# Altium PCB WS7.820.291.V04.PcbDoc (part 1 of 3)
Units mil, origin at the board's own origin, x right, y up, seen from the top; angles counter-clockwise.
Board outline 9222.63 x 1665.56 mil, 4 copper layers (Top Layer, S2, S3, Bottom Layer); 240 components, 148 nets, 713 pads, 1711 vias.
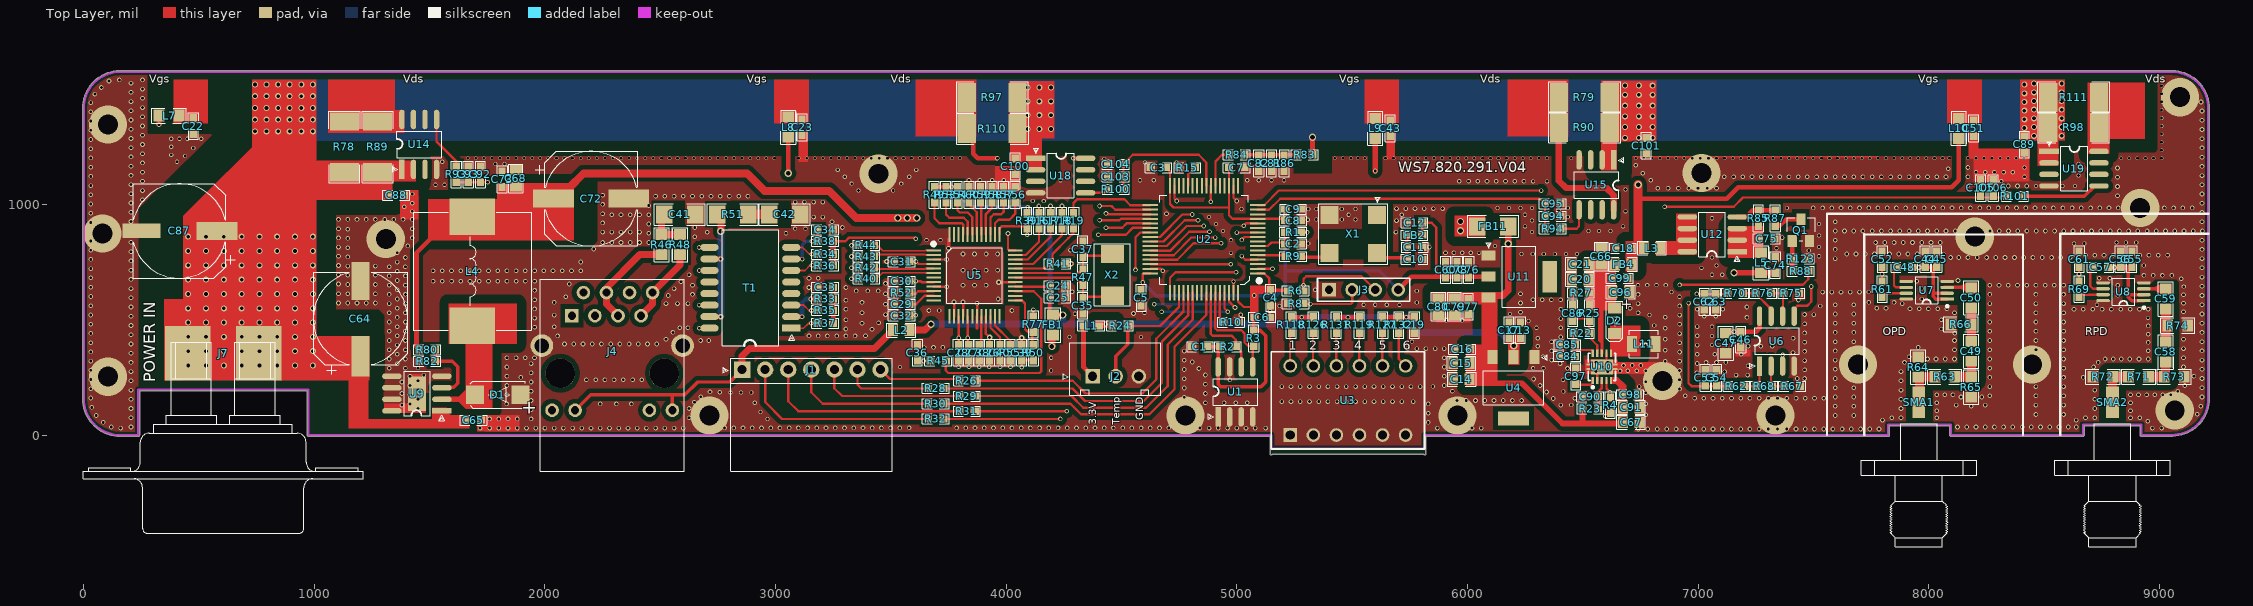
[diagram p0: Top Layer view]
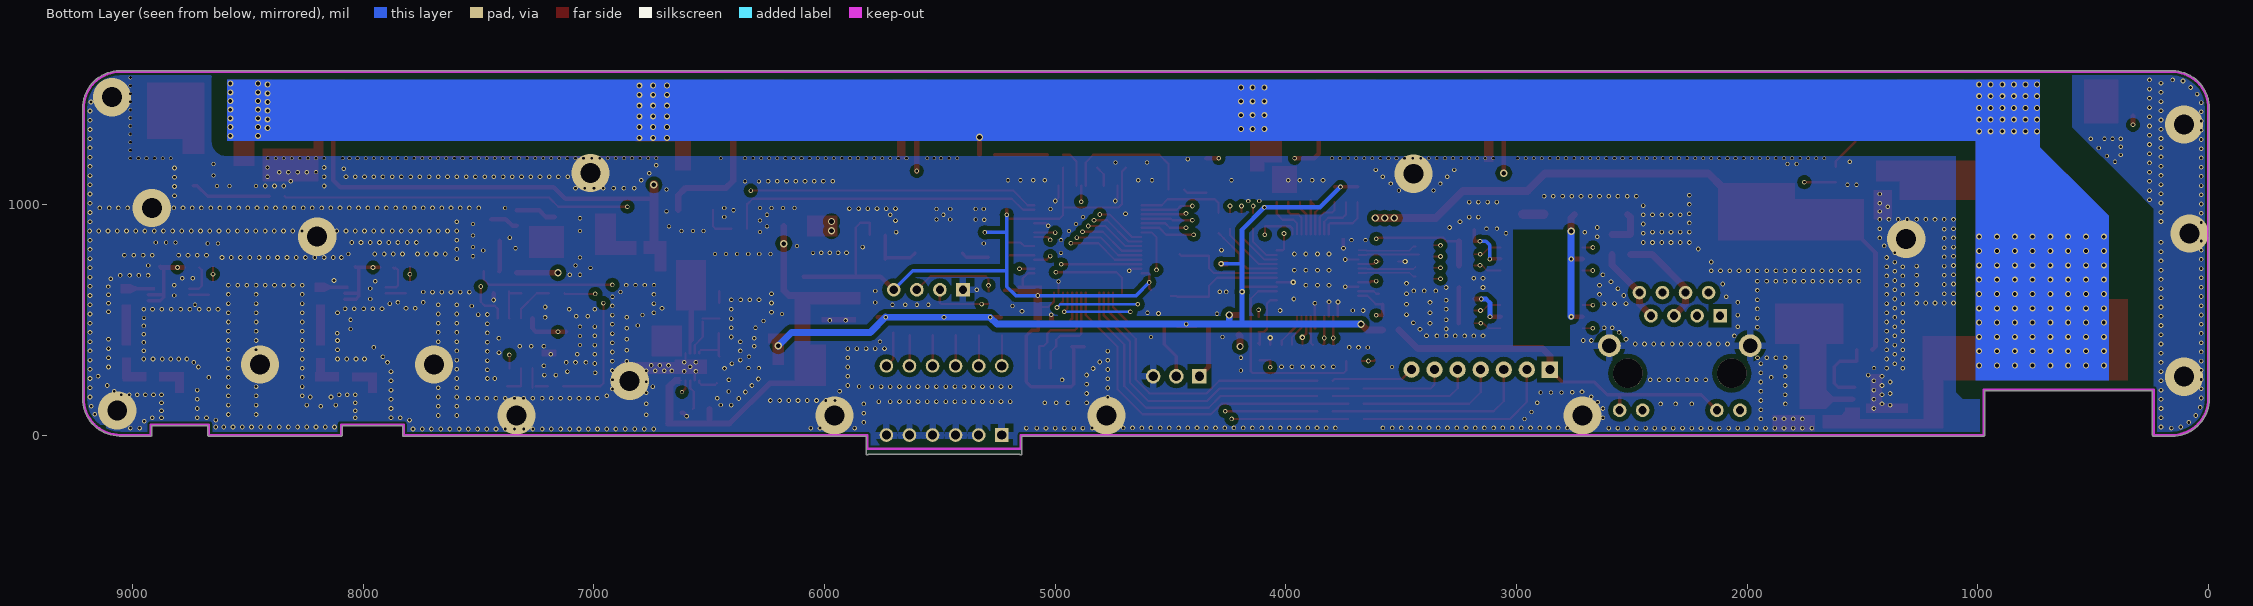
[diagram p1: Bottom Layer view, seen from below]
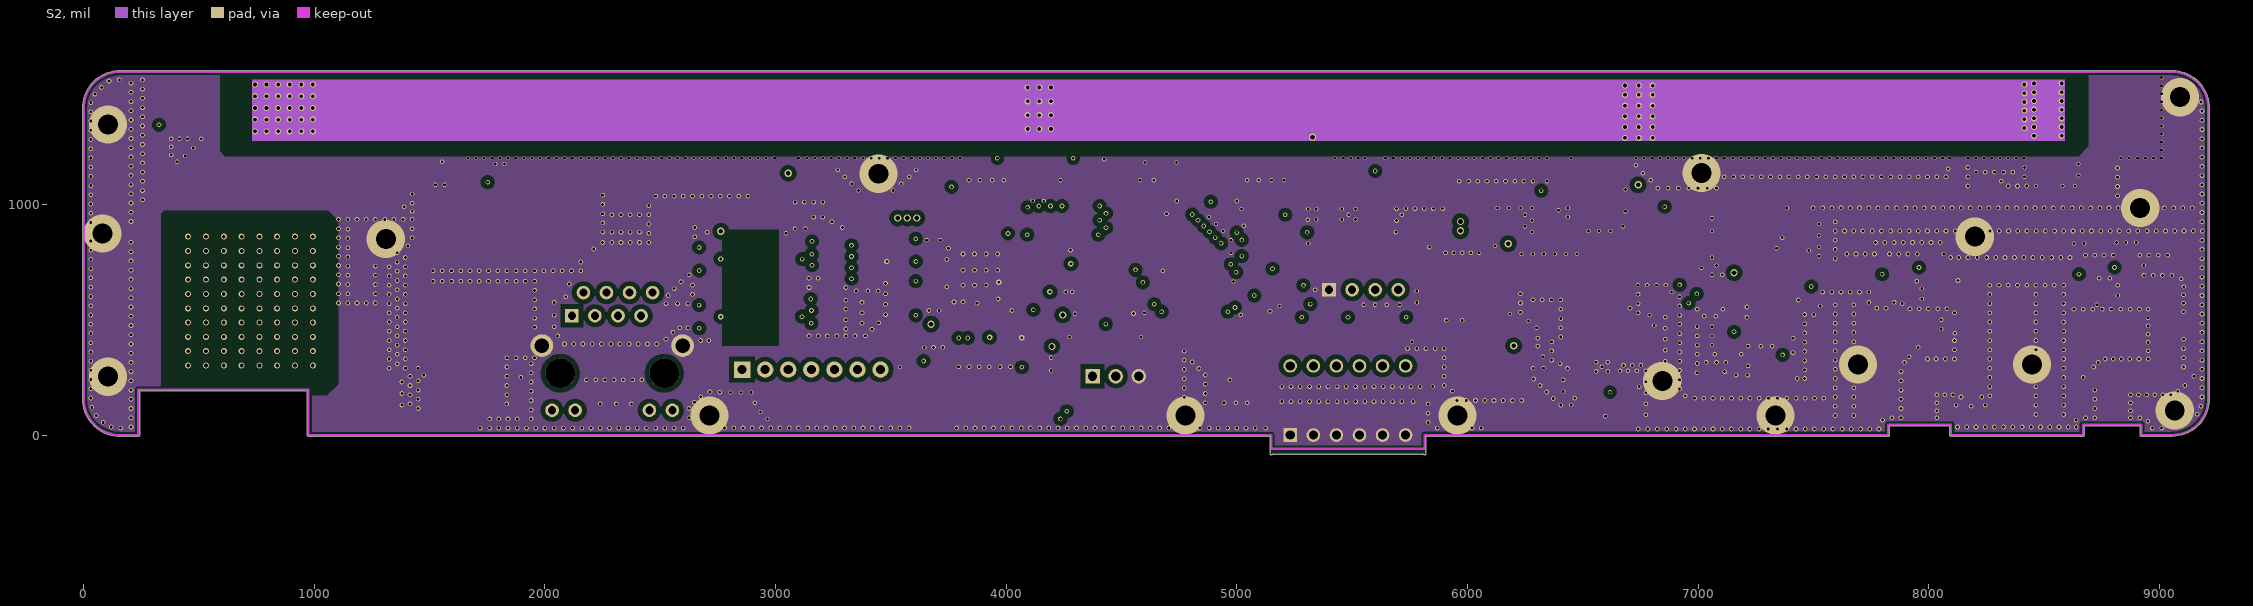
[diagram p2: S2]
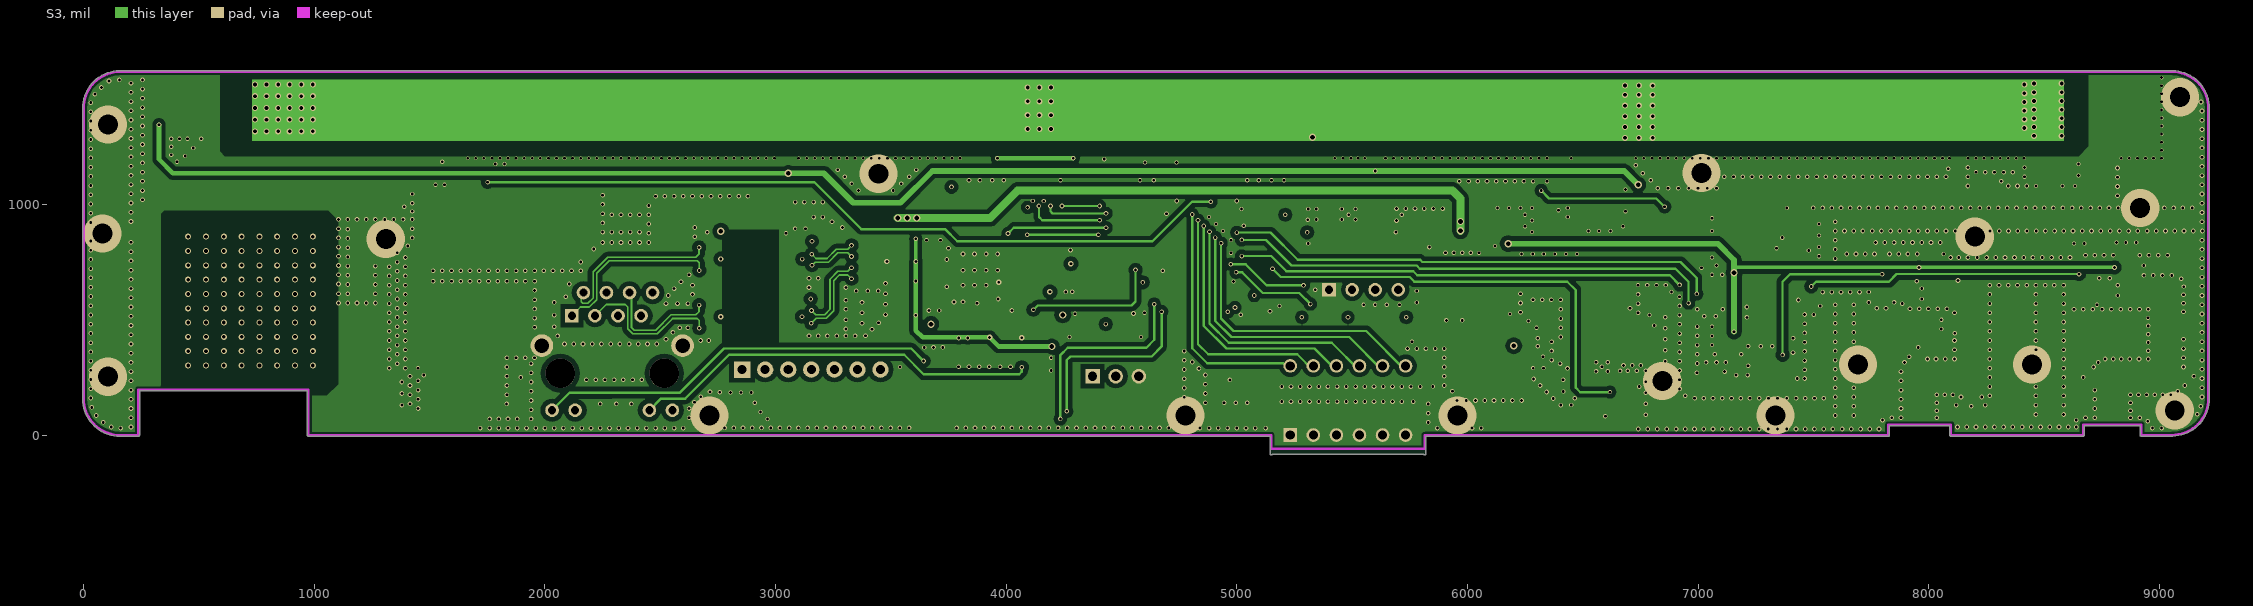
[diagram p3: S3]

## Layer stack, top to bottom
Top Solder: solder mask 0.4, Solder Resist, Dk 3.5
Top Layer: signal copper 1.4
Dielectric1: core 12.6, FR-4, Dk 4.8
S2: signal copper 1.4
Dielectric2: prepreg 12.6, FR-4, Dk 4.8
S3: signal copper 1.4
Dielectric3: core 12.6, FR-4, Dk 4.8
Bottom Layer: signal copper 1.4
Bottom Solder: solder mask 0.4, Solder Resist, Dk 3.5

## Board outline
157.8,-5.02 237.23,-5.02 ccw(c237.23,0) 242.25,0 242.25,191.84 969.99,191.84 969.99,0 ccw(c975,0) 975.03,-5.01 5144.16,-5.01 5144.16,-80.74 ccw(c5149.17,-80.74) 5153.18,-83.76 5810.52,-83.76 ccw(c5814.53,-80.74) 5819.54,-80.74 5819.54,-5.02 7825,-5.02 ccw(c7825,0) 7830.01,0 7830.01,40.1 8091.99,40.1 8091.99,0 ccw(c8097,0) 8097,-5.02 8669,-5.02 ccw(c8669,0) 8674.01,0 8674.01,40.1 8916.99,40.1 8916.99,0 ccw(c8922,0) 8922,-5.01 9055.12,-5.01 ccw(c9055.12,0) 9057.37,-4.48 ccw(c9055.12,158) 9217.61,158 9217.61,1417 ccw(c9055.12,1417) 9056.91,1579.49 ccw(c9055.12,1574.8) 9055.12,1579.82 157.48,1579.82 ccw(c157.48,1574.8) 155.68,1579.49 ccw(c157.48,1417) -5.01,1417 -5.01,159 ccw(c0,159) -4.69,157.23 ccw(c157.8,157.48)

## Design rules (kind name [scope] priority, off if disabled: settings)
Clearance Clearance_4 [InNet('28VIN') vs (InPolygon)] p1: gap=66.93
Clearance Clearance_3 [(InPolygon) vs isfill] p2: gap=40
Clearance Clearance_2 [All vs OnLayer('Keep-Out Layer')] p3: gap=10
Clearance Clearance_1 [All vs (InPolygon)] p4: gap=19.68
Clearance [All] p5: gap=8
DiffPairsRouting DiffPair_DiffPairsRouting [All] p1: maxlimit=10 minlimit=8.5 mostfreqgap=8.5 toplayer_minwidth=15 toplayer_maxwidth=15 toplayer_prefwidth=15 midlayer1_minwidth=15 midlayer1_maxwidth=15 midlayer1_prefwidth=15 midlayer2_minwidth=15 midlayer2_maxwidth=15 midlayer2_prefwidth=15 bottomlayer_minwidth=15 bottomlayer_maxwidth=15 bottomlayer_prefwidth=15 maxuncoupledlength=500
DiffPairsRouting [All] p2: maxlimit=10 minlimit=10 mostfreqgap=10 toplayer_minwidth=15 toplayer_maxwidth=15 toplayer_prefwidth=15 midlayer1_minwidth=15 midlayer1_maxwidth=15 midlayer1_prefwidth=15 midlayer2_minwidth=15 midlayer2_maxwidth=15 midlayer2_prefwidth=15 bottomlayer_minwidth=15 bottomlayer_maxwidth=15 bottomlayer_prefwidth=15 maxuncoupledlength=500
HoleSize [All] p1: absolutevalues=TRUE maxlimit=393.7 minlimit=1 maxpercent=80.000 minpercent=20.000
HoleToHoleClearance [All] p1: gap=8 allowstackedmicrovias=TRUE
MatchedLengths DiffPair_MatchedLengths [All] p1: tolerance=1000 checknetsindiffpair=FALSE checkdiffpairvsdiffpair=TRUE checkothers=FALSE
MinimumSolderMaskSliver [All] p1: minsoldermaskwidth=0
PlaneConnect [isvia] p1: planeconnectstyle=Direct reliefexpansion=20 reliefentries=4 reliefconductorwidth=10 reliefairgap=10
PlaneConnect PlaneConnect_1 [All] p2: planeconnectstyle=Relief reliefexpansion=20 reliefentries=4 reliefconductorwidth=30 reliefairgap=10
PolygonConnect PolygonConnect_1 [isvia] p1: connectstyle=Direct reliefconductorwidth=10 reliefentries=4 polygonreliefangle="90 Angle" airgapwidth=10
PolygonConnect [OnLayer('Bottom Layer')] p2: connectstyle=Relief reliefconductorwidth=30 reliefentries=4 polygonreliefangle="90 Angle" airgapwidth=10
PolygonConnect PolygonConnect_2 [All] p3: connectstyle=Direct reliefconductorwidth=10 reliefentries=4 polygonreliefangle="90 Angle" airgapwidth=10
RoutingVias [All] p1: holewidth=12 width=20 viastyle="Through Hole" minholewidth=12 minwidth=20 maxholewidth=28 maxwidth=50
SilkToSilkClearance [All] p1: silktosilkclearance=0
SilkToSolderMaskClearance SilkscreenOverComponentPads [IsPad] p1: minsilkscreentomaskgap=0 clearancetoexposedcopper=TRUE
SolderMaskExpansion [All] p1: expansion=4
Width DiffPair_Width [All] p1: maxlimit=100 minlimit=7.5 preferedwidth=7.5
Width [All] p2: maxlimit=39.37 minlimit=7.5 preferedwidth=10 midlayer1_maxwidth=10 midlayer2_maxwidth=10 minimp=50.000000 maximp=50.000000 favimp=50.000000
22 further rules are at their usual default settings.

## Classes and differential pairs
component class 3-RF: C44 C45 C46 C47 C48 C49 C50 C52 C53 C54 C55 C56 C57 C58 C59 C61 C62 C63 C69 C70 C71 C111 C118 C119 C120 C122 C123 C124 C125 C126 C127 D3 Q2 Q3 R61 R62 R63 R64 R65 R66 R67 R68 R69 R70 R71 R72 R73 R74 R75 R76 R137 R138 R139 R140 R141 R142 R143 R144 R145 R146 R147 R148 SMA1 SMA2 U6 U7 U8
component class 4-POWER: C13 C14 C15 C16 C17 C18 C19 C20 C21 C22 C23 C43 C51 C60 C64 C65 C66 C67 C68 C72 C73 C74 C75 C76 C77 C78 C79 C80 C81 C82 C83 C84 C85 C86 C87 C88 C89 C90 C91 C92 C93 C94 C95 C96 C97 C98 C99 C100 C101 C103 C104 C105 C106 C? D1 D2 FB4 FB11 J7 L3 L4 L5 L7 L8 L9 L10 L11 Q1 R4 R22 R23 R25 R27 R78 R79 R80 R82 R83 R84 R85 R86 R87 R88 R89 R90 R93 R94 R97 R98 R100 R101 R110 R111 R123 U4 U9 U10 U11 U12 U13 U14 U15 U18 U19
component class 2-RJ45: C24 C25 C26 C27 C28 C29 C30 C31 C32 C33 C34 C35 C36 C37 C38 C39 C40 C41 C42 FB1 J4 R33 R34 R35 R36 R37 R38 R39 R40 R41 R42 R43 R44 R45 R46 R47 R48 R49 R50 R51 R52 R53 R54 R55 R56 R57 R58 R59 R60 T1 U5 X2
component class 1-MCU: C1 C2 C3 C4 C5 C6 C7 C8 C9 C10 C11 C12 FB2 J1 J2 J3 L1 L2 R1 R2 R3 R6 R8 R9 R10 R15 R16 R17 R18 R19 R24 R26 R28 R29 R30 R31 R32 R77 R118 R119 R126 R127 R131 R132 TP3 U1 U2 U3 X1
differential pair W5500_TX1: +W5500_TX1_P -W5500_TX1_N
differential pair W5500_RX1: +W5500_RX1_P -W5500_RX1_N
differential pair TX: +TX_P -TX_N
differential pair TX1: +TX1_P -TX1_N
differential pair RX: +RX_P -RX_N
differential pair RX1: +RX1_P -RX1_N

## Components (designator, comment, footprint, x,y, rotation, side; value= is the part's Value field where it differs from the comment)
C1 "0.1uF" C0603#1 4840,383.65 r0 top
C2 "0.1uF" C0603#1 5243.85,828.76 r180 top
C3 "0.1uF" C0603#1 4660,1160 r0 top
C4 "0.1uF" C0603#1 5146.35,595 r90 top
C5 "0.1uF" C0603#1 4585,595 r90 top
C6 "0.1uF" C0603#1 5110,510 r180 top
C7 "0.1uF" C0603#1 5000,1160 r180 top
C8 "0.1uF" C0603#1 5243.85,930 r180 top
C9 "10uF/6.3V" C0603#1 5243.77,980 r180 top
C10 "10uF/6.3V" C0603#1 5770.32,761.23 r180 top
C11 "0.1uF" C0603#1 5770.32,814.05 r0 top
C12 "0.1uF" C0603#1 5770.85,920.23 r180 top
C13 "0.1uF" C0603#2 6230,455 r90 top
C14 "10uF/10V" C0805#1 5974,242 r0 top
C15 "10uF/10V" C0805#1 5974,312 r0 top
C16 "0.1uF" C0603#2 5978,372 r180 top
C17 "10uF/6.3V" C0603#2 6180,455 r90 top
C18 "0.1uF" C0603#2 6675,810.35 r180 top
C19 "10uF/6.3V" C0603#2 5770,477.23 r270 top
C20 "10uF/10V" C0805#1 6489,675 r0 top
C21 "10uF/10V" C0805#1 6489,740 r0 top
C22 "0.1uF" C0603#2 475,1340 r90 top
C23 "0.1uF" C0603#2 3115,1335 r90 top
C24 "0.1uF" C0603#1 4222.85,647.46 r180 top
C25 "10uF/6.3V" C0603#1 4222.85,596.23 r180 top
C26 "0.1uF" C0603#1 3927.85,357.46 r90 top
C27 "0.1uF" C0603#1 3837.85,357.46 r90 top
C28 "0.1uF" C0603#1 3792.85,357.46 r90 top
C29 "0.1uF" C0603#1 3546.85,567.46 r0 top
C30 "0.1uF" C0603#1 3546.85,667.46 r0 top
C31 "0.1uF" C0603#1 3546.85,752.46 r0 top
C32 "10uF/6.3V" C0603#1 3546.85,517.46 r0 top
C33 "10nF" C0603#1 3215,640 r0 top
C34 "22nF" C0603#1 3216,890.23 r180 top
C35 "18pF" C0603#1 4332.85,561.23 r90 top
C36 "1000pF" C0603#1 3615,357.46 r270 top
C37 "18pF" C0603#1 4332.85,806.23 r270 top
C38 "4.7uF" C0603#1 3882.85,357.46 r90 top
C39 "1000pF" C0603#1 4067.85,357.46 r270 top
C40 "10nF" C0603#1 3972.85,357.46 r90 top
C41 "1000pF/2KV" C1206 2585,957 r180 top
C42 "1000pF/2KV" C1206 3039.85,957 r180 top
C43 "0.1uF" C0603#2 5665,1330 r90 top
C44 "100pF" C0603#1 7985,763 r90 top
C45 "0.1uF" C0603#1 8035,763 r90 top
C46 "0.1uF" C0603#1 7185.09,414 r270 top
C47 "10uF/10V" C0805#2 7120.09,398 r270 top
C48 "0.1uF" C0603#1 7895,726.65 r0 top
C49 "100pF" C0805#2 8185,363.12 r90 top
C50 "100pF" C0805#2 8185,595 r90 top
C51 "0.1uF" C0603#2 8195,1330 r90 top
C52 "0.1uF" C0603#1 7798,763 r270 top
C53 "10uF/6.3V" C0603#1 7031.56,248.46 r270 top
C54 "0.1uF" C0603#1 7081.56,248.46 r270 top
C55 "100pF" C0603#1 8881.27,763 r90 top
C56 "0.1uF" C0603#1 8831.27,763 r90 top
C57 "0.1uF" C0603#1 8745,726.65 r0 top
C58 "100pF" C0805#2 9027.69,360.27 r90 top
C59 "100pF" C0805#2 9027.69,590 r90 top
C60 "10uF/6.3V" C0603#2 5905,717 r90 top
C61 "0.1uF" C0603#1 8652,763 r270 top
C62 "10uF/6.3V" C0603#1 7026.56,578.46 r90 top
C63 "0.1uF" C0603#1 7076.56,578.47 r90 top
C64 "100uF/63V" ECAP2SM_10R4x10R4#1 1200,505 r90 top
C65 "0.1uF" C0603#1 1689,65 r180 top
C66 "10uF/10V" C0805#1 6580,775 r270 top
C67 "10uF/10V" C0805#1 6710,55.83 r180 top
C68 "10uF/10V" C0805#1 1874,1113 r270 top
C72 "1000uF/16V" ECAP2SM_10R4x10R4#2 2200,1025 r0 top
C73 "0.1uF" C0603#1 1814,1109 r270 top
C74 "1uF" C0603#1 7334.4,737.23 r90 top
C75 "0.1uF" C0603#1 7298.05,850.46 r0 top
C76 "1uF" C0603#1 6005,717 r270 top
C77 "0.1uF" C0603#1 6004,557 r90 top
C78 "10uF/6.3V" C0603#2 5955,717 r90 top
C79 "10uF/10V" C0805#1 5944,557 r90 top
C80 "10uF/10V" C0805#1 5874,557 r90 top
C81 "10uF/6.3V" C0603#1 5150,1178.65 r90 top
C82 "0.1uF" C0603#1 5095,1178.65 r90 top
C84 "0.1uF" C0603#2 6433,341 r0 top
C85 "0.1uF" C0603#2 6433,391 r0 top
C86 "10pF" C0603#2 6456.65,529 r270 top
C87 "100uF/63V" ECAP2SM_10R4x10R4#3 415,885 r180 top
C88 "0.1uF" C0603#1 1355,1040 r180 top
C89 "0.1uF" C0603#1 8415,1260 r90 top
C90 "0.1uF" C0603#2 6533,166 r180 top
C91 "10uF/10V" C0805#1 6710,120 r180 top
C92 "10uF/6.3V" C0603#1 1720.65,1130 r270 top
C93 "0.1uF" C0603#1 1667.83,1130 r270 top
C94 "10uF/6.3V" C0603#1 6370,949.33 r180 top
C95 "0.1uF" C0603#1 6370,1003.65 r180 top
C96 "10uF/10V" C0805#1 6665,620 r180 top
C97 "10NF" C0603#2 6469.35,255 r90 top
C98 "1uF" C0603#2 6706,175 r0 top
C99 "0.1uF" C0603#2 6661,680 r0 top
C100 "0.1uF" C0603#1 4038.85,1165 r90 top
C101 "0.1uF" C0603#1 6775,1255 r90 top
C103 "10uF/6.3V" C0603#1 4475,1120 r0 top
C104 "0.1uF" C0603#1 4475,1175 r0 top
C105 "10uF/6.3V" C0603#1 8225,1071.35 r270 top
C106 "0.1uF" C0603#1 8280,1071.35 r270 top
D1 "SS36" DO-214AC 1795,175 r180 top
D2 "SL02" SL02 6638,496 r270 top
FB1 "FB" L0805#1 4202.85,477.46 r270 top
FB2 "FB_0603" L0603 5770.85,867.41 r0 top
FB4 "open" L0805#2 6675,740 r0 top
FB11 "FB_1206" L1206 6110,905 r0 top
J1 "open" "KF2510-7P -2R54-17R8x6R0-wanzhen" 2855,283.77 r0 top
J2 "XH2.54-3P" XH2.54mm-10R0x7R0--zhizhen 4375,255 r0 top
J3 "Header 4" HDR1X4 5400,630 r0 top
J4 "RJ45插座" RJ45TH-1x1-2R54-LED 2291.85,567.49 r0 top
J7 "DB2" DB2TM-VM 605,355 r180 top locked
L1 "FB_0603" L0603 4369,473 r0 top
L2 "FB_0805" L0805#2 3545,455 r0 top
L3 "FB_0805" L0805#2 6800,811 r180 top
L4 "100uH" PL2SM-12R5x12R5 1685,710 r180 top
L5 "FB_0805" L0805#1 7273.05,747.23 r90 top
L7 "FB" L0805#1 370,1385 r0 top
L8 "FB" L0805#1 3055,1335 r90 top
L9 "FB" L0805#1 5600,1330 r90 top
L10 "FB" L0805#1 8130,1330 r90 top
L11 "4.7uF" PL2SM-3R0x3R0 6765,395 r180 top
Q1 "MMBT2222" SOT23-3 7445.97,888.67 r270 top
R1 "4.7K" R0603 5243.85,878.83 r0 top
R2 "4.7K" R0603 4961.85,383.65 r180 top
R3 "4.7K" R0603 5073.65,420 r90 top
R4 "10K" R0603 6620,130 r270 top
R6 "4.7K" R0603 5255,625 r180 top
R8 "4.7K" R0603 5255,570 r0 top
R9 "30Ω" R0603 5244.38,774.23 r180 top
R10 "1K" R0603 4975,490 r180 top
R15 "1K" R0603 4785,1160 r0 top
R16 "30Ω" R0603 4142,929 r270 top
R17 "30Ω" R0603 4192,929 r270 top
R18 "30Ω" R0603 4242,929 r270 top
R19 "30Ω" R0603 4292,929 r270 top
R22 "150KΩ" R0603 6493,441 r180 top
R23 "10Ω" R0603 6533,113 r0 top
R24 "4.7K" R0603 4494,473 r0 top
R25 "619KΩ" R0603 6529.35,529 r270 top
R26 "300Ω" R0603 3830,235 r0 top
R27 "100KΩ" R0603 6493,616 r180 top
R28 "300Ω" R0603 3695,202 r0 top
R29 "300Ω" R0603 3830,169 r0 top
R30 "300Ω" R0603 3695,136 r0 top
R31 "300Ω" R0603 3830,103 r0 top
R32 "300Ω" R0603 3695,70 r0 top
R33 "0Ω" R0603 3215,590 r180 top
R34 "49.9Ω" R0603 3216,784 r0 top
R35 "82Ω" R0603 3216,540.23 r180 top
R36 "49.9Ω" R0603 3216,735 r0 top
R37 "82Ω" R0603 3216,485.23 r180 top
R38 "10Ω" R0603 3216,840.23 r0 top
R39 "4.7K" R0603 4090,929 r90 top
R40 "30Ω" R0603 3393.85,677.46 r180 top
R41 "4.7K" R0603 4222.85,742.46 r0 top
R42 "30Ω" R0603 3393.85,725.8 r180 top
R43 "30Ω" R0603 3393.85,774.13 r180 top
R44 "30Ω" R0603 3393.85,822.46 r180 top
R45 "300Ω" R0603 3705,321.12 r0 top
R46 "75Ω" R0805 2506,825.47 r270 top
R47 "1M" R0603 4332.85,684.46 r270 top
R48 "75Ω" R0805 2586,825.47 r270 top
R49 "4.7K" R0603 3688.85,1042.46 r90 top
R50 "300Ω" R0603 4117.85,357.46 r90 top
R51 "75Ω" R1206 2814.85,957 r180 top
R52 "12.4K" R0603 3546.85,617.46 r0 top
R53 "4.7K" R0603 3738.85,1042.46 r90 top
R54 "4.7K" R0603 3788.85,1042.46 r90 top
R55 "1K" R0603 4017.85,357.46 r90 top
R56 "1K" R0603 4038.85,1042.46 r270 top
R57 "1K" R0603 3988.85,1042.46 r270 top
R58 "1K" R0603 3938.85,1042.46 r270 top
R59 "1K" R0603 3888.85,1042.46 r270 top
R60 "1K" R0603 3838.85,1042.46 r270 top
R61 "1K" R0603 7798,633 r90 top
R62 "0Ω" R0603 7166.56,212.12 r180 top
R63 "240Ω" R0805 8070,253.12 r0 top
R64 "62Ω" R0805 7955,295 r270 top
R65 "62Ω" R0805 8185,208.12 r90 top
R66 "51Ω" R0805 8140,480 r0 top
R67 "open" R0603 7408.85,212.12 r180 top
R68 "0Ω" R0603 7286.56,212.12 r180 top
R69 "1K" R0603 8652,633 r90 top
R70 "0Ω" R0603 7161.56,614.81 r180 top
R71 "240Ω" R0805 8910.35,253.12 r0 top
R72 "62Ω" R0805 8755.69,253.12 r0 top
R73 "62Ω" R0805 9065,253.12 r180 top
R74 "51Ω" R0805 9080,475 r180 top
R75 "open" R0603 7403.85,614.81 r180 top
R76 "0Ω" R0603 7282.7,614.81 r180 top
R77 "0Ω" R0603 4117.85,480 r270 top
R78 "0.004" R2512 1130,1250 r90 top (schematic designator R45)
R79 "0.004" R2512 6507,1464 r180 top (schematic designator R47)
R80 "6.2K" R0603 1490,370 r180 top
R82 "2K" R0603 1490,320 r180 top
R83 "12.4K" R0603 5295,1215 r180 top
R84 "1K" C0603#1 5000,1215 r0 top
R85 "10K" R0603 7261.7,940.46 r270 top
R86 "1.5K" R0603 5205,1178.65 r90 top
R87 "0Ω" R0603 7334.4,940.46 r90 top
R88 "1K" R0603 7444.85,710.88 r180 top
R89 "0.004" R2512 1275,1250 r90 top (schematic designator R198)
R90 "0.004" R2512 6507,1334 r180 top (schematic designator R199)
R93 "1K" R0603 1615,1130 r270 top
R94 "1K" R0603 6370,895 r180 top
R97 "0.004" R2512 3939,1464 r180 top (schematic designator R202)
R98 "0.004" R2512 8629,1334 r0 top (schematic designator R102)
R100 "1K" R0603 4475,1065 r0 top
R101 "1K" R0603 8374,1035 r180 top
R110 "0.004" R2512 3939,1329 r180 top (schematic designator R92)
R111 "0.004" R2512 8629,1464 r0 top (schematic designator R93)
R118 "4.7K" R0603 5236.85,477.23 r90 top
R119 "4.7K" R0603 5531.85,477.23 r90 top
R123 "1K" R0603 7444.85,763.57 r180 top
R126 "4.7K" R0603 5331.85,477.23 r90 top
R127 "4.7K" R0603 5631.85,477.23 r90 top
R131 "4.7K" R0603 5431.85,477.23 r90 top
R132 "4.7K" R0603 5701.85,477.23 r90 top
SMA1 "SMA-50KFD-4" SMA-50KFD-4 7955,142.18 r270 top (schematic designator SMA2)
SMA2 "SMA-50KFD-4" SMA-50KFD-4 8794.33,142.18 r270 top locked (schematic designator SMA3)
T1 "HX1188NL" SOP16-1R27-7R11x12R7 2890.85,638.46 r180 top locked
U1 "AT24C02N" SOIC8_1R27_3R9x4R9 4994,187 r90 top
U2 "STM32F103RCT6" LQFP64-0R50-10x10 4856.32,848.23 r90 top locked
U3 "2.54mm-6P" CON12TM-2R54-2X6-BOMA 5481.85,149.97 r0 top
U4 "LM1117S-3.3" SOT-223 6200,205 r180 top
U5 "W5500" TQFN48-0R5-7X7 3862.85,692.46 r0 top locked
U6 "LM358" SOIC8_1R27_3R9x4R9 7341.56,407.46 r90 top
U7 "AD8361ARMZ" micro_SOIC8-0R65-3x3 7991.55,627.65 r180 top locked
U8 "AD8361ARMZ" micro_SOIC8-0R65-3x3 8844.73,621.39 r180 top locked
U9 "LM2576HVDP-ADJ" SOIC8_1R27_3R9x4R9-1 1445,180 r180 top
U10 "TPS63700DRCR" VSON10-0R5-3x3 6583,296 r90 top
U11 "LM1117S-3.3" SOT-223 6224,687 r270 top
U12 "IRF7240TR" SOIC8_1R27_3R9x4R9 7061.58,870.46 r180 top
U14 "MAX4080TASA" SOIC8_1R27_3R9x4R9 1455,1260 r90 top
U15 "MAX4080TASA" SOIC8_1R27_3R9x4R9 6559,1085 r270 top
U18 "MAX4080TASA" SOIC8_1R27_3R9x4R9 4236,1125 r0 top
U19 "MAX4080TASA" SOIC8_1R27_3R9x4R9 8630,1155 r0 top
X1 "8M" CRY4SM-5R0x7R0 5505,872 r180 top
X2 "25M" CRY2SM-6R0x3R5 4460.85,694.46 r270 top

## Footprints (in the part's own frame and the unit in brackets; to place one, negate y for a bottom-side part, rotate by r counter-clockwise, add the part's x,y. Pads: shape width x height; smd on the part's side, far side on the other; paste and mask are expansions set on the pad)
C0603#1 [mm]
  rect 0.9x0.8 smd: 1(-0.85,0) 2(0.85,0)
  silkscreen extent -1.47,-0.55 1.47,0.55
C0603#2 [mm]
  rect 0.9x0.8 smd: 1(0.85,0) 2(-0.85,0)
  silkscreen extent -1.47,-0.55 1.47,0.55
C0805#1 [mm]
  rect 1.1x1.3 smd: 1(-0.9,0) 2(0.9,0)
  silkscreen extent -1.57,-0.76 1.57,0.76
C0805#2 [mm]
  rect 1.2x1.3 smd: 1(-1.1,0) 2(1.1,0)
  silkscreen extent -1.88,-0.84 1.88,0.84
C1206 [mm]
  rect 1.8x2 smd: 1(-1.7,0) 2(1.7,0)
  silkscreen extent -2.79,-1.19 2.79,1.19
CON12TM-2R54-2X6-BOMA [mm]
  rect 1.5x1.5 hole 1: 1(-6.35,-3.81)
  round 1.5 hole 1: 2(-6.35,3.81) 3(-3.81,-3.81) 4(-3.81,3.81) 5(-1.27,-3.81) 6(-1.27,3.81) 7(1.27,-3.81) 8(1.27,3.81) 9(3.81,-3.81) 10(3.81,3.81) 11(6.35,-3.81) 12(6.35,3.81)
  silkscreen extent -8.45,-5.36 8.45,5.36
CRY2SM-6R0x3R5 [mm]
  rect 2x2.5 smd: 1(-2.3,0) 2(2.3,0)
  silkscreen extent -3.4,-2.03 3.4,1.97
CRY4SM-5R0x7R0 [mm]
  rect 2x2 smd: 1(-2.6,-2.1) 2(2.6,-2.1) 3(2.6,2.1) 4(-2.6,2.1)
  silkscreen extent -3.81,-4.02 3.81,3.33
DB2TM-VM [mm] "DB2"
  rect 5x6 smd: 1(-3.9,0) 2(3.9,0)
  Top Overlay keep-out lines w0.1: -1.298,2.812 -5.698,2.812
  silkscreen extent -15.4,-1.19 15.4,19.81
DO-214AC [mm]
  rect 2x2 smd: 1(-2.5,0) 2(2.5,0)
  silkscreen extent -3.04,-1.49 3.04,1.49
ECAP2SM_10R4x10R4#1 [mm]
  rect 4.5x2 smd: 1(-4.15,0)
  rect 4.191x2 smd: 2(4.15,0)
  silkscreen extent -6.16,-5.21 5.08,5.21
ECAP2SM_10R4x10R4#2 [mm]
  rect 4.5x2 smd: 1(-4.15,0) 2(4.15,0)
  silkscreen extent -6.16,-5.21 5.08,5.21
ECAP2SM_10R4x10R4#3 [mm]
  rect 4.5x2 smd: 1(-4.15,0)
  rect 4.191x1.6 smd: 2(4.15,0)
  silkscreen extent -6.16,-5.21 5.08,5.21
HDR1X4 [mm] "Connector; Header; 4 Position"
  rect 1.5x1.5 hole 0.9: 1(0,0)
  round 1.5 hole 0.9: 2(2.54,0) 3(5.08,0) 4(7.62,0)
  silkscreen extent -1.27,-1.27 8.89,1.27
"KF2510-7P -2R54-17R8x6R0-wanzhen" [mm]
  rect 1.8x1.8 hole 1: 1(0,0)
  round 1.8 hole 1: 2(2.54,0) 3(5.08,0) 4(7.62,0) 5(10.16,0) 6(12.7,0) 7(15.24,0)
  silkscreen extent -2.12,-11.2 16.56,1.24
L0603 [mm]
  rect 0.9x0.8 smd: 1(-0.85,0) 2(0.85,0)
  silkscreen extent -1.47,-0.55 1.47,0.55
L0805#1 [mm]
  rect 1.2x1.3 smd: 1(-1.1,0) 2(1.1,0)
  silkscreen extent -1.88,-0.84 1.88,0.84
L0805#2 [mm]
  rect 1.1x1.3 smd: 1(-0.9,0) 2(0.9,0)
  silkscreen extent -1.57,-0.76 1.57,0.76
L1206 [mm]
  rect 1.8x2 smd: 1(-1.7,0) 2(1.7,0)
  silkscreen extent -2.79,-1.19 2.79,1.19
LQFP64-0R50-10x10 [mm] "STM32F103RC"
  rect 0.22x1.7 smd: 1(-3.731,-5.941) 2(-3.231,-5.941) 3(-2.731,-5.941) 4(-2.231,-5.941) 5(-1.731,-5.941) 6(-1.231,-5.941) 7(-0.731,-5.941) 8(-0.231,-5.941) 9(0.269,-5.941) 10(0.769,-5.941) 11(1.269,-5.941) 12(1.769,-5.941) 13(2.269,-5.941) 14(2.769,-5.941) 15(3.269,-5.941) 16(3.769,-5.941) 33(3.769,5.861) 34(3.269,5.861) 35(2.769,5.862) 36(2.269,5.862) 37(1.769,5.862) 38(1.269,5.862) 39(0.769,5.862) 40(0.269,5.862) 41(-0.231,5.862) 42(-0.731,5.862) 43(-1.231,5.862) 44(-1.731,5.862) 45(-2.231,5.862) 46(-2.731,5.862) 47(-3.231,5.862) 48(-3.731,5.861)
  rect 1.7x0.22 smd: 17(5.917,-3.793) 18(5.917,-3.293) 19(5.917,-2.793) 20(5.917,-2.293) 21(5.917,-1.793) 22(5.917,-1.293) 23(5.917,-0.793) 24(5.917,-0.293) 25(5.917,0.207) 26(5.917,0.707) 27(5.917,1.207) 28(5.917,1.707) 29(5.917,2.207) 30(5.917,2.707) 31(5.917,3.207) 32(5.917,3.707) 49(-5.886,3.713) 50(-5.886,3.213) 51(-5.886,2.713) 52(-5.886,2.213) 53(-5.886,1.713) 54(-5.886,1.213) 55(-5.886,0.713) 56(-5.886,0.213) 57(-5.886,-0.287) 58(-5.886,-0.787) 59(-5.886,-1.287) 60(-5.886,-1.787) 61(-5.886,-2.286) 62(-5.886,-2.786) 63(-5.886,-3.287) 64(-5.886,-3.786)
  silkscreen extent -4.92,-6.32 4.86,4.85
micro_SOIC8-0R65-3x3 [mm] "检波器"
  rect 1.5x0.35 smd: 1(-2.25,0.975)
  oval 1.5x0.35 smd: 2(-2.25,0.325) 3(-2.25,-0.325) 4(-2.25,-0.975) 5(2.25,-0.975) 6(2.25,-0.325) 7(2.25,0.325) 8(2.25,0.975)
  silkscreen extent -2.38,-1.5 1.23,1.87
PL2SM-3R0x3R0 [mm]
  rect 1.1x1.8 smd: 1(-1.3,0) 2(1.3,0)
  silkscreen extent -1.6,-1.5 1.6,1.5
PL2SM-12R5x12R5 [mm]
  rect 5x4 smd: 1(0,6) 2(0,-6)
  silkscreen extent -6.5,-6.5 6.5,6.5
R0603 [mm]
  rect 0.9x0.8 smd: 1(-0.85,0) 2(0.85,0)
  silkscreen extent -1.47,-0.55 1.47,0.55
R0805 [mm]
  rect 1.2x1.3 smd: 1(-1.1,0) 2(1.1,0)
  silkscreen extent -1.88,-0.84 1.88,0.84
R1206 [mm]
  rect 1.8x2 smd: 1(-1.7,0) 2(1.7,0)
  silkscreen extent -2.79,-1.19 2.79,1.19
R2512 [mm]
  rect 2x3.2 smd: 1(-2.8,0) 2(2.8,0)
  silkscreen extent -3.99,-1.7 3.91,1.7
RJ45TH-1x1-2R54-LED [mm]
  rect 1.5x1.5 hole 0.9: 1(-4.445,-1.27)
  round 1.5 hole 0.9: 2(-3.175,1.27) 3(-1.905,-1.27) 4(-0.635,1.27) 5(0.635,-1.27) 6(1.905,1.27) 7(3.175,-1.27) 8(4.445,1.27) 9(-6.63,-11.68) 10(-4.09,-11.68) 11(4.09,-11.68) 12(6.63,-11.68)
  round 2.5 hole 1.6: 13(-7.75,-4.57) 14(7.75,-4.57)
  round 3.25 hole 3.25 unplated: 15(-5.715,-7.62) 16(5.715,-7.62)
  silkscreen extent -7.94,-18.42 7.94,2.73
SL02 [mm]
  rect 1.2x1.5 smd: 1(-1.4,0) 2(1.4,0)
  silkscreen extent -2.16,-0.9 2.28,0.9
SMA-50KFD-4 [mm] "SMA-JB3C"
  rect 3.5x1.4 smd: 1(0,0.06)
  silkscreen extent 2.37,-6.29 15.9,6.41
SOIC8_1R27_3R9x4R9 [mm]
  rect 2.15x0.6 smd: 1(-2.75,1.905)
  oval 2.15x0.6 smd: 2(-2.75,0.635) 3(-2.75,-0.635) 4(-2.75,-1.905) 5(2.75,-1.905) 6(2.75,-0.635) 7(2.75,0.635) 8(2.75,1.905)
  silkscreen extent -3.02,-2.45 1.47,2.99
SOIC8_1R27_3R9x4R9-1 [mm]
  rect 2.15x0.6 smd: 1(-2.75,1.905)
  oval 2.15x0.6 smd: 2(-2.75,0.635) 3(-2.75,-0.635) 4(-2.75,-1.905) 5(2.75,-1.905) 6(2.75,-0.635) 7(2.75,0.635) 8(2.75,1.905)
  rect 2x3.8 smd: 9(0,0)
  silkscreen extent -3.02,-2.45 1.47,2.99
SOP16-1R27-7R11x12R7 [mm]
  rect 2x0.76 smd: 1(-4.5,4.445)
  oval 2x0.76 smd: 2(-4.5,3.175) 3(-4.5,1.905) 4(-4.5,0.635) 5(-4.5,-0.635) 6(-4.5,-1.905) 7(-4.5,-3.175) 8(-4.5,-4.445) 9(4.5,-4.445) 10(4.5,-3.175) 11(4.5,-1.905) 12(4.5,-0.635) 13(4.5,0.635) 14(4.5,1.905) 15(4.5,3.175) 16(4.5,4.445)
  silkscreen extent -4.84,-6.4 3.1,6.4
SOT23-3 [mm]
  rect 1.3x1 smd: 1(1.2,-0.95) 2(1.2,0.95) 3(-1.2,0)
  silkscreen extent -1.34,-1.5 1.2,1.5
SOT-223 [mm]
  rect 1.1x1.55 smd: 1(-2.3,-3.375) 2(0,-3.375) 3(2.3,-3.375)
  rect 3.45x1.55 smd: 4(0,3.375)
  silkscreen extent -3.7,-3.65 3.35,1.85
TQFN48-0R5-7X7 [mm]
  rect 1.6x0.22 smd: 1(-4.5,2.75) 2(-4.5,2.25) 3(-4.5,1.75) 4(-4.5,1.25) 5(-4.5,0.75) 6(-4.5,0.25) 7(-4.5,-0.25) 8(-4.5,-0.75) 9(-4.5,-1.25) 10(-4.5,-1.75) 11(-4.5,-2.25) 12(-4.5,-2.75) 25(4.5,-2.75) 26(4.5,-2.25) 27(4.5,-1.75) 28(4.5,-1.25) 29(4.5,-0.75) 30(4.5,-0.25) 31(4.5,0.25) 32(4.5,0.75) 33(4.5,1.25) 34(4.5,1.75) 35(4.5,2.25) 36(4.5,2.75)
  rect 0.22x1.6 smd: 13(-2.75,-4.5) 14(-2.25,-4.5) 15(-1.75,-4.5) 16(-1.25,-4.5) 17(-0.75,-4.5) 18(-0.25,-4.5) 19(0.25,-4.5) 20(0.75,-4.5) 21(1.25,-4.5) 22(1.75,-4.5) 23(2.25,-4.5) 24(2.75,-4.5) 37(2.75,4.5) 38(2.25,4.5) 39(1.75,4.5) 40(1.25,4.5) 41(0.75,4.5) 42(0.25,4.5) 43(-0.25,4.5) 44(-0.75,4.5) 45(-1.25,4.5) 46(-1.75,4.5) 47(-2.25,4.5) 48(-2.75,4.5)
  silkscreen extent -4.72,-3.06 3.06,3.65
VSON10-0R5-3x3 [mm] "QFN, 12-Leads, Body 4.0x4.0mm (max), Pitch 0.50mm, IPC Low Density"
  rect 0.8x0.25 smd: 1(-1.5,1) 2(-1.5,0.5) 3(-1.5,0) 4(-1.5,-0.5) 5(-1.5,-1) 6(1.5,-1) 7(1.5,-0.5) 8(1.5,0) 9(1.5,0.5) 10(1.5,1)
  rect 0.25x0.8 smd: 11(-0.25,1.3) 11(-0.25,-1.3) 11(0.25,1.3) 11(0.25,-1.3)
  rect 1.65x2.4 smd: 11(0,0)
  silkscreen extent -2.37,-1.5 1.5,1.5
XH2.54mm-10R0x7R0--zhizhen [mm]
  rect 1.6x1.6 hole 1: 1(0,0)
  round 1.6 hole 1: 2(2.54,0) 3(5.08,0)
  silkscreen extent -3.31,-2.1 7.5,3.7

## Part data
C1 C2 C3 C4 C5 C6 C7 C8 C11 C12 C16 C24 C26 C27 C28 C29 C30 C31 C45 C46 C48 C52 C54 C56 C57 C61 C63 C65 C73 C75 C77 C82 C88 C89 C93 C95 C100 C101 C104 C106: library part 0.1uF贴片电容, "贴片电容_GRM188R71H104KA01D_0.1uF±10%,50V,0603"
C9 C10 C17 C19 C25 C32 C53 C60 C62 C78 C81 C92 C94 C103 C105: library part 10uF贴片电容, "贴片电容_GRM188R60J106ME47D_10uF±20%,6.3V,0603"
C13 C74 C76: library part 1uF贴片电容, "贴片电容_GRM188R61A105KA61D_1uF±10%,10V,0603"
C14 C15 C20 C21 C47 C66 C67 C68 C79 C80 C91 C96: library part 10uF贴片电容, "贴片电容_GRM21BR61A106KE19L_10uF±10%,10V,0805"
C18 C22 C23 C43 C51 C84 C85 C90 C99: "GRM188R71H104KA01D"
C33 C40: library part 0.1uF贴片电容, "贴片电容_10nF±10%,50V,0603"
C34: library part 27nF贴片电容, "贴片电容_22nF±5%,50V,0603"
C35 C37: library part 20pF贴片电容, "贴片电容_18pF±5%,50V,0603"
C36 C39: library part 1000pF贴片电容, "贴片电容_GRM188R71H102KA01_1000pF±10%,50V,0603"
C38: library part 1uF贴片电容, "贴片电容_4.7uF±10%,50V,0603"
C41 C42: library part 10uF贴片电容, "贴片电容_1000pF/2KV"
C44 C55: library part 220pF贴片电容, "贴片电容_100pF±10%,50V,0603"
C49 C50 C58 C59: library part 100pF贴片电容, "贴片电容_GRM2165C1H101JA01D_100pF±5%,50V,0805"
C64 C87: "贴片电解电容_VEJ101M1JTR-1010_100uF/63V,±20%,表贴D10*H10"
C72: "贴片电解电容_VE102M1CTR-1010_1000uF/16V,±20%,表贴10*10"
C86: library part 10pF贴片电容, "贴片电容_0603CG100J500NT_10pF±5%,50V,0603"
C97: library part 0.1uF, "0603,10NF,50V,±10％,X7R"
C98: library part 0.1uF
D1: library part 肖特基整流二极管_SS36, "肖特基整流二极管_SS36_封装SMA,3A/60V"
D2: library part 肖特基整流二极管_SS36, "肖特基整流二极管_SL02_1.1A/20V"
FB1 FB4 L1 L2 L3 L5 L7 L8 L9 L10: library part 0805贴片磁珠, "贴片磁珠_600R,0805"
FB2: library part 0603贴片磁珠, "贴片磁珠_100R,0603"
FB11: library part 1206贴片磁珠, "贴片磁珠_30R,6A,1206"
J1: library part KF2510-7P连接器, "连接器_KF2510-7P_直插,间距2.54mm"
J2: "连接器_XH2.54-3P_弯针,间距2.54mm"
J3: "Header, 4-Pin"
J4: library part RJ45弯脚带灯, "RJ45插座_1*1,带左黄右绿灯,弯脚"
J7: library part DB2公头座子, "连接器_DB2公头,电源接头"
L4: library part 100uH贴片功率电感, "贴片功率电感_SLF12575T-101M1R9-PF_100uH±20%,额定电流1.9A,12.5x12.5"
L11: library part SLF6025T-100M1R0-PF, "SLF6025-4.7uF"
Q1: "NPN三极管_MMBT2222_表贴SOT23"
R1 R2 R3 R6 R24 R39 R41 R49 R53 R54: library part 4.7K贴片电阻, "贴片电阻_4.7K±5%,0603"
R4 R85: library part 10K贴片电阻, "贴片电阻_10K±5%,0603"
R8 R10 R15 R55 R56 R57 R58 R59 R60 R61 R69 R84 R88 R93 R94 R100 R101 R123: library part 1K贴片电阻, "贴片电阻_1K±5%,0603"
R9 R16 R17 R18 R19 R40 R42 R43 R44: library part 30Ω贴片电阻, "贴片电阻_30Ω±5%,0603"
R22 R25 R27: library part 10Ω贴片电阻
R23 R38: library part 10Ω贴片电阻, "贴片电阻_10Ω±5%,0603"
R26 R28 R29 R30 R31 R32 R45 R50: library part 300Ω贴片电阻, "贴片电阻_300Ω±5%,0603"
R33 R62 R68 R70 R76 R77 R87: library part 0Ω贴片电阻, "贴片电阻_0Ω±5%,0603"
R34 R36: library part 51Ω贴片电阻, "贴片电阻_49.9Ω±1%,0603"
R35 R37: library part 51Ω贴片电阻, "贴片电阻_82Ω±1%,0603"
R46 R48: library part 75Ω贴片电阻, "贴片电阻_75Ω±5%,0805"
R47: library part 1M贴片电阻, "贴片电阻_1M±5%,0603"
R51: library part 75Ω贴片电阻, "贴片电阻_75Ω±5%,1206"
R52: library part 12K贴片电阻, "贴片电阻_12.4K±1%,0603"
R63 R71: library part 300Ω贴片电阻, "贴片电阻_300Ω±5%,0805"
R64 R65 R72 R73: library part 62Ω贴片电阻, "贴片电阻_62Ω±5%,0805"
R66 R74: library part 51Ω贴片电阻, "贴片电阻_51Ω±5%,0805"
R67 R75: library part 0Ω贴片电阻
R78 R79 R89 R90 R97 R98 R110 R111: library part 0.004Ω检流电阻-大封装, "贴片电阻_LR12DTDSR004_0.004±5%,2W,2512"
R80: library part 6.2K贴片电阻, "贴片电阻_6.2K±5%,0603"
R82: library part 2K贴片电阻, "贴片电阻_2K±5%,0603"
R83: library part 12.4K贴片电阻, "贴片电阻_12.4K±1%,0603"
R86: library part 1.5K贴片电阻, "贴片电阻_1.5K±5%,0603"
R118 R119 R126 R127 R131 R132: library part 1.5K贴片电阻, "贴片电阻_4.7K±5%,0603"
SMA1 SMA2: "射频同轴连接器_SMA-50KFD-4"
T1: "网络变压器_HX1188NL_百兆,SOIC16"
U1: "EEPROM_AT24C02N_SOIC8"
U2: "MCU_STM32F103RCT6_32bit,LQFP64"
U3: library part 拨码开关, "拨码开关_2.54mm-6P_侧拨"
U4 U11: "LDO_LM1117S-3.3_1A输出,SOT223"
U5: "以太网控制器_W5500_LQFP48"
U6: "运算放大器_LM358_SOIC8"
U7 U8: "检波器_AD8361ARMZ_LF to 2.5 GHz,SOIC8"
U9: "稳压集成电路_LM2576HVDP-ADJ_3A输出,SOIC8"
U10: "负压转换器_TPS63700DRCR_360mA输出,VSON-10"
U12: "P-MOSFET_IRF7240TR_SOIC8"
U14 U15 U18 U19: "电流检测放大器_MAX4080TASA_SOIC8"
X1: library part 16M贴片有源晶振, "贴片有源晶振_8M,20ppm,封装5x7"
X2: library part 25M贴片无源晶体, "贴片无源晶体_25MHz,30ppm,6035封装"

## Via types
v1: diameter 20, hole 12, Top Layer to Bottom Layer, tented both sides, 1181 vias
v2: diameter 18, hole 12, Top Layer to Bottom Layer, tented both sides, 177 vias
v3: diameter 26, hole 16, Top Layer to Bottom Layer, tented both sides, 160 vias
v4: diameter 15.75, hole 12, Top Layer to Bottom Layer, tented both sides, 151 vias
v5: diameter 165.35, hole 86.61, Top Layer to Bottom Layer, 17 vias
v6: diameter 32, hole 20, Top Layer to Bottom Layer, tented both sides, 14 vias
v7: diameter 23.62, hole 11.81, Top Layer to Bottom Layer, tented both sides, 8 vias
v8: diameter 30, hole 20, Top Layer to Bottom Layer, tented both sides, 1 vias
v9: diameter 20, hole 11.81, Top Layer to Bottom Layer, tented both sides, 1 vias
v10: diameter 20, hole 12, Top Layer to Bottom Layer, 1 vias

## Nets (pads, with @x,y where several pads share a name; then routed paths per layer and width w, separated by ;. In a path a pad name is that pad's centre, name@x,y a point inside that pad or via, vN(x,y) a via of type N, cw(c..) or ccw(c..) an arc to the next point about the centre after c; other vN are vias at no path point)
3.3VADD: C26.2 C27.2 C28.2 C29.2 C30.2 C31.2 C32.2 FB1.2 R34.2 R36.2 R38.2 U5.4 U5.8 U5.11 U5.15 U5.17 U5.21 | length 2291.6
  Top Layer w10: R38.2@3249.46,840.23 3303.23,840.23 3319,856 3603,856 v1(3608,851) ; C29.2@3586.43,567.46 3609.46,567.46 3645.88,603.88 U5.11@3685.69,603.88 ; C31.2@3594.06,752.46 v1(3608.54,752.46) 3619.32,741.68 U5.4@3685.69,741.68 ; v1(3608,667.46) 3628.47,667.46 3633,662.94 U5.8@3685.69,662.94 ; C28.2@3792.85,390.93 3793.95,392.03 v1(3793.95,421) U5.15@3793.95,515.3 ; U5.17@3833.32,515.3 v1(3833.32,421) 3833.32,395.46 C27.2@3837.85,390.93 ; U5.21@3912.06,515.3 3912.06,439.25 v7(3927.85,423.46) C26.2@3927.85,390.93
  Top Layer w15: C29.2@3580.31,567.46 C32.2@3580.31,517.46 3581.85,519 v1(3608,519)
  Top Layer w25: R36.2@3249.46,735 R38.2@3249.46,840.23
  Top Layer w30: v8(4198,384) 4198,429.31 FB1.2@4202.85,434.16
  S3 w15: v1@3608,752.46 v1(3608,851) v1@3608.54,850.46
  S3 w20: v1(3608.54,752.46) 3608.54,453.09 3638.17,423.46 v7(3927.85,423.46) 3967.31,384 v8(4198,384)
3.3VCC: C1.2 C3.2 C4.2 C5.2 C6.2 C7.2 C8.2 C9.2 C12.1 C60.2 C76.2 C78.2 FB2.2 J3.4 R1.2 R2.2 R3.2 R6.2 U1.8 U2.1 U2.13 U2.19 U2.32 U2.48 U2.64 U11.2 | length 4508.3
  Top Layer w10: C5.2@4585,628.46 4592,635.46 v1(4592,662) 4592,697 4596.36,701.36 U2.48@4625.55,701.36 ; C3.2@4693.46,1160 4710.39,1143.07 U2.32@4710.39,1081.2 ; 4710.39,1129.61 U2.32@4710.39,1081.2 ; 4965,987 4725,987 4710.39,1001.61 U2.32@4710.39,1081.2 ; 4966,1013.7 4966,953 4981.42,937.58 U2.13@5090.23,937.58 C8.2@5195.7,937.58 ; 4966.3,1014 U2.19@4966.3,1081.2 4966.3,1159.76 C7.2@4966.54,1160 ; U2.64@5005.39,616.52 5005.39,579.61 5030,555 5076.54,555 ; U2.1@5090.23,701.36 5118.24,701.36 5141.35,678.25 C4.2@5141.35,628.46 ; C8.2@5206.7,932.58 C8.2@5210.39,928.9 ; R6.2@5218.07,628.46 R6.2@5221.54,625 ; FB2.2@5804.31,867.41 C12.1@5804.31,920.23 5844.77,920.23 5865,900 5865,692
  Top Layer w15: C1.2@4873.46,383.65 R2.2@4928.39,383.65 4919,374.27 U1.8@4919,295.27 ; U1.8@4919,290.27 U1.8@4919,295.27 ; C6.2@5073.65,510 R3.2@5073.65,453.46 5102.54,453.46 5125,431 5125,230 5105,210 4930,210 4919,221 U1.8@4919,295.27 ; C4.2@5146.35,628.46 R6.2@5218.07,628.46 ; C8.2@5210.39,930 v1(5210.39,955) C9.2@5210.39,980 ; R1.2@5277.31,878.83 v1(5305,878.83)
  Top Layer w20: J3.4@5700,630 5757,687 U11.2@6091.13,687
  Bottom Layer w15: v1(4592,662) 4649,605 v1(5076,605) 5171.54,605 5210.39,643.85 5210.39,713 ; v1(5210.39,955) 5210.39,878.83 ; v1(5305,878.83) 5210.39,878.83 ; J3.4@5700,630 5617,713 5210.39,713 ; 5210.39,713 5210.39,878.83
3.3VCC1: C13.2 C17.2 C19.2 C24.2 C25.2 FB1.1 L1.2 L2.2 R24.1 R39.2 R41.2 R49.2 R53.2 R54.2 R118.2 R119.2 R126.2 R127.2 R131.2 R132.2 U4.2 U5.28 | length 4496.8
  Top Layer w10: U5.28@4040.02,643.25 4188.6,643.25 C24.2@4189.39,642.46
  Top Layer w15: R49.2@3688.85,1075.93 R53.2@3738.85,1075.93 R54.2@3788.85,1075.93 ; FB1.1@4189.39,534.23 C25.2@4189.39,596.23 C24.2@4189.39,642.46
  Top Layer w20: R118.2@5236.85,510.69 R126.2@5331.85,510.69 ; R131.2@5431.85,510.69 R119.2@5531.85,510.69 ; R127.2@5631.85,510.69 C19.2@5770,510.69 ; R132.2@5701.85,510.69 R132.2@5704,510.69
  Top Layer w25: FB1.1@4202.85,520.77 v6(4245.23,520.77) ; R41.2@4256.31,742.46 v7(4280.85,742.46)
  Top Layer w30: L2.2@3580.43,455 3648,455 v6(3674,481)
  Bottom Layer w15: 4187,481 4189.85,483.85 ; 4189.85,742.46 v7(4280.85,742.46)
  Bottom Layer w20: v1(3763,1075.93) 3851.93,987 v1(4093,987) 4189.85,890.15 4189.85,742.46 v7(4189.85,620.81) 4189.85,483.85
  Bottom Layer w30: v6(3674,481) 4187,481 v1(4432,481) 5252.31,481 v1(5282,510.69) v1@5734.69,510.69 ; 4245.23,483.92 v6(4245.23,520.77) ; v1(5735,511) 5802,444 6144,444 v6(6201,387)
  other v1: 5482,510.69
3.3VCC11: J1.1 J4.10 J4.12 L2.1 | length 1626.9
  Top Layer w15: J4.10@2130.83,107.65 2198.18,175 2552.87,175 ; J4.12@2552.87,107.65 2552.87,175 ; J1.1@2855,283.77 2801.23,230 2662,230 2607,175 2552.87,175
  Top Layer w30: J1.1@2857,285.77 J1.1@2855,283.77 2855,342 2888,375 3429.57,375 L2.1@3509.57,455
28VIN: C64.1 C65.2 C87.1 C88.2 C89.2 C100.2 C101.2 J7.1 J7.2 R78.1 R79.1 R83.1 R89.1 R90.1 R97.1 R98.1 R110.1 R111.1 U9.1 U14.1 U14.2 U15.1 U15.2 U18.1 U18.2 U19.1 U19.2 | length 678.3
  Top Layer w15: 1624,65 C65.2@1655.54,65
  Top Layer w20: R83.1@5328.46,1215 v6(5328.46,1291.54)
  Top Layer w40: C64.1@1191,262 1214,239 1214,49 1529,49 1533,53 1533,80
  other v3: 453.38,301.54 530.58,301.54 607.77,301.54 684.96,301.54 762.16,301.54 839.35,301.54 916.54,301.54 993.73,301.54 453.38,363.59 530.58,363.59 607.77,363.59 684.96,363.59 762.16,363.59 839.35,363.59 916.54,363.59 993.73,363.59 453.38,425.64 530.58,425.64 607.77,425.64 684.96,425.64 762.16,425.64 839.35,425.64 916.54,425.64 993.73,425.64 453.38,487.69 530.58,487.69 607.77,487.69 684.96,487.69 762.16,487.69 839.35,487.69 916.54,487.69 993.73,487.69 453.38,549.74 530.58,549.74 607.77,549.74 684.96,549.74 762.16,549.74 839.35,549.74 916.54,549.74 993.73,549.74 453.38,611.8 530.58,611.8 607.77,611.8 684.96,611.8 762.16,611.8 839.35,611.8 916.54,611.8 993.73,611.8 453.38,673.85 530.58,673.85 607.77,673.85 684.96,673.85 762.16,673.85 839.35,673.85 916.54,673.85 993.73,673.85 453.38,735.9 530.58,735.9 607.77,735.9 684.96,735.9 762.16,735.9 839.35,735.9 916.54,735.9 993.73,735.9 453.38,797.95 530.58,797.95 607.77,797.95 684.96,797.95 762.16,797.95 839.35,797.95 916.54,797.95 993.73,797.95 453.38,860 530.58,860 607.77,860 684.96,860 762.16,860 839.35,860 916.54,860 993.73,860 6683,1288.92 6743,1288.92 6803,1288.92 8457,1297.75 8577,1297.75 743,1316.92 793.15,1316.92 843.29,1316.92 893.44,1316.92 943.59,1316.92 993.73,1316.92 4093.23,1327 4144,1327 4194.77,1327 8415,1331.17 6683,1335.44 6743,1335.44 6803,1335.44 8457,1335.46 8577,1335.46 743,1367.69 793.15,1367.69 843.29,1367.69 893.44,1367.69 943.59,1367.69 993.73,1367.69 8415,1368.88 8457,1373.16 8577,1373.16 6683,1381.96 6743,1381.96 6803,1381.96 4093.23,1387 4144,1387 4194.77,1387 8415,1406.59 8457,1410.87 8577,1410.87 743,1418.46 793.15,1418.46 843.29,1418.46 893.44,1418.46 943.59,1418.46 993.73,1418.46 6683,1428.48 6743,1428.48 6803,1428.48 8415,1444.3 4093.23,1447 4144,1447 4194.77,1447 8457,1448.58 8577,1448.58 743,1469.23 793.15,1469.23 843.29,1469.23 893.44,1469.23 943.59,1469.23 993.73,1469.23 6683,1475 6743,1475 6803,1475 8415,1482.01 8457,1486.29 8577,1486.29 4093.23,1507 4144,1507 4194.77,1507 6803,1515.18 6683,1516 6743,1515.59 743,1520 793.15,1520 843.29,1520 893.44,1520 943.59,1520 993.73,1520 8415,1519.72 8457,1524 8577,1524
28VOUT1: R78.2 R89.2 U14.8
28VOUT2: R97.2 R110.2 U18.8 | length 616.8
  Top Layer w20: R110.2@3828.76,1329 3857,1300.76 3857,1219 3876,1200 v1(3962,1200) ; v1(4291,1200) U18.8@4344.27,1200
  S3 w20: v1(3962,1200) v1(4291,1200)
28VOUT3: R79.2 R90.2 U15.8 | length 557.5
  Top Layer w27.56: R90.2@6396.76,1334 6396.76,1103.24 6429,1071 6603,1071 6634,1040 U15.8@6634,976.73
28VOUT4: R98.2 R111.2 U19.8
+5V: C14.2 C15.2 C16.2 C44.1 C45.1 C46.1 C47.1 C48.2 C55.1 C56.1 C57.2 C67.2 C74.1 C77.2 C79.2 C80.2 C91.2 C98.2 FB11.2 L5.1 R23.1 U4.3 U6.8 U7.1 U7.2 U8.1 U8.2 U10.5 U11.3 | length 5382.8
  Top Layer w10: U10.5@6622.37,236.94 6648.06,236.94 6668,217 C98.2@6668,181
  Top Layer w15: C48.2@7928.46,726.65 v1(7958,726.65) 8019,726.65 ; C45.1@8035,729.54 8032.12,726.65 8019,726.65 ; U7.1@8080.13,589.26 8030.74,589.26 8019,601 8019,619 ; U7.2@8080.13,614.85 8023.15,614.85 8019,619 ; C55.1@8866,726.65 8866,597 8880,583 U8.1@8933.31,583 ; 8866.59,608.59 U8.2@8933.31,608.59 ; 8019,619 8019,726.65
  Top Layer w20: C47.1@7121.25,447.46 v1(7156,447.46) 7251.65,447.46 7266.56,462.38 U6.8@7266.56,505.73 ; C57.2@8778.46,726.65 v1(8806,726.65) 8878.39,726.65 C55.1@8881.27,729.54
  Top Layer w25: 6097,225 6237,225 6412,50 6680.39,50 C67.2@6674.57,55.83 6672.54,57.86 C98.2@6672.54,175 ; 6499.54,56.29 R23.1@6499.54,113 ; v6(7156,703.76) C74.1@7334.4,703.76
  Top Layer w30: U11.3@6091.13,596.45 6099.68,605 6155,605 6176.93,626.93 v6(6176.93,830) FB11.2@6176.93,905
  S3 w15: 7159.35,726.65 v1(7958,726.65) v1(8806,726.65)
  S3 w25: v6(6176.93,830) 7085,830 7156,759 v6(7156,703.76) v1(7156,447.46)
+5V_1: C18.2 FB4.2 L3.2 L7.1 L8.1 L9.1 L10.1 | length 8991.7
  Top Layer w20: v1(326.69,1345) L7.1@326.69,1385 ; v6(3055,1135) L8.1@3055,1291.69 ; v6@6739.57,1075 6739.57,1025 7125,1025 7175,1075 8100,1075 8130,1105 L10.1@8130,1286.69
  Top Layer w25: v1(5600,1145) L9.1@5600,1286.69
  Top Layer w40: 6739.57,810 6739.57,1075 v6@6739.57,1085
  S3 w20: v1(326.69,1345) 326.69,1195.31 387,1135 v6(3055,1135)
  S3 w25: v6(3055,1135) 3209.04,1135 3337.04,1007 3542,1007 3680,1145 v1(5600,1145) 6680,1145 v6(6740,1085)
-5V: C20.2 C21.2 C66.2 C96.2 C99.2 D2.1 FB4.1 R25.1 R27.1 U10.8 | length 195.9
  Top Layer w12: U10.8@6583,355.06 6583,551
ACTLED: R45.2 U5.27 | length 902.9
  Top Layer w10: R45.2@3738.46,321.12 3738.46,279.54 3749,269 4145,269 4152,276 4152,591 4119.43,623.57 U5.27@4040.02,623.57
AT_DAC: U2.21
BD_TEMP: J2.2 R24.2 U2.51 | length 556.9
  Top Layer w10: R24.2@4527.46,473 4667,473 4749.49,555.49 U2.51@4749.49,616.52
  Top Layer w15: J2.2@4475,255 4475,341 4527.46,393.46 R24.2@4527.46,473
COMM_LED: R32.2 U2.62 | length 1834.4
  Top Layer w10: R32.2@3728.46,70 v1(4235,70) ; U2.62@4966.02,616.52 4966.02,578.98 v1(4992,553) v1@4995,550
  S3 w10: v1(4235,70) 4235,347 4267,379 4608,379 4642,413 v1(4642,567)
  Bottom Layer w10: v1(4642,567) 4683,567 ; 4659,567 4683,567 ; v1@4995,550 v1(4992,553) 4978,567 4683,567
CPU_USERCLK: R9.2 U2.5 | length 111.9
  Top Layer w10: U2.5@5090.23,780.1 R9.2@5196.26,780.1 ; R9.2@5207.26,775.1 R9.2@5211.39,779.23
CURR_LED: R30.2 U2.57 | length 1540.2
  Top Layer w10: R30.2@3728.46,136 4279,136 4325,90 4621,90 4730,199 4730,383 4867.6,520.6 U2.57@4867.6,616.52
DUPLED: U5.26